# Altium PCB CR99101.PcbDoc
Units mm, origin at the board's own origin, x right, y up, seen from the top; angles counter-clockwise.
Board outline 18 x 20 mm, 2 copper layers (L 01 (Top), L 02), stack 1.506 mm thick; 14 components, 42 nets, 79 pads, 10 vias.
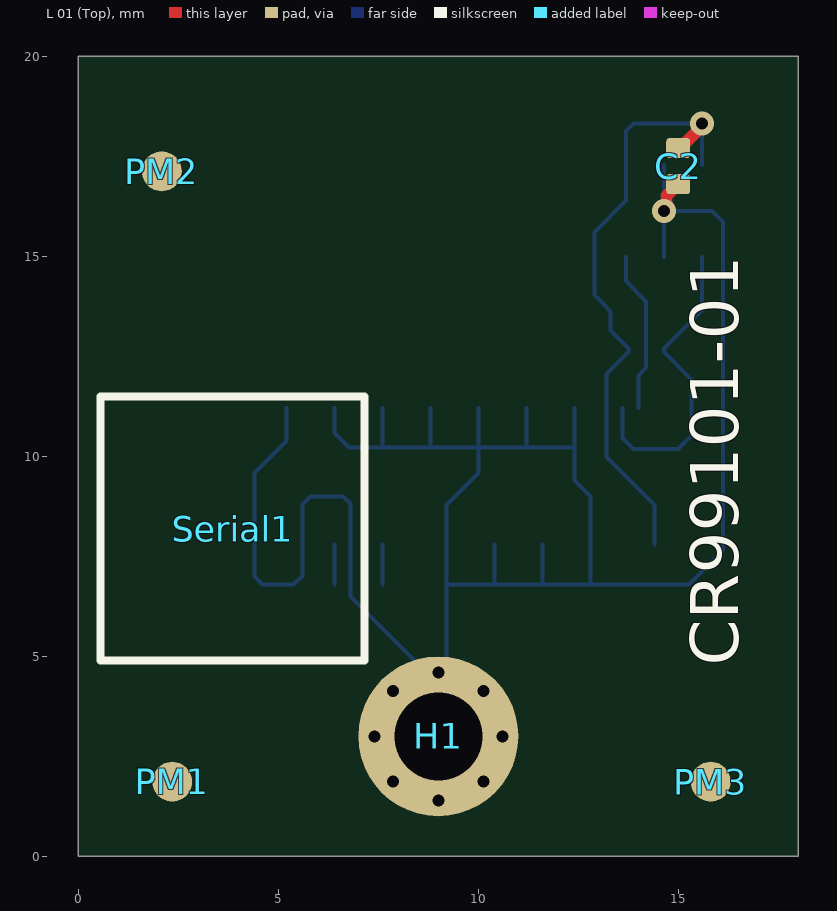
[diagram p0: L 01 (Top) view]
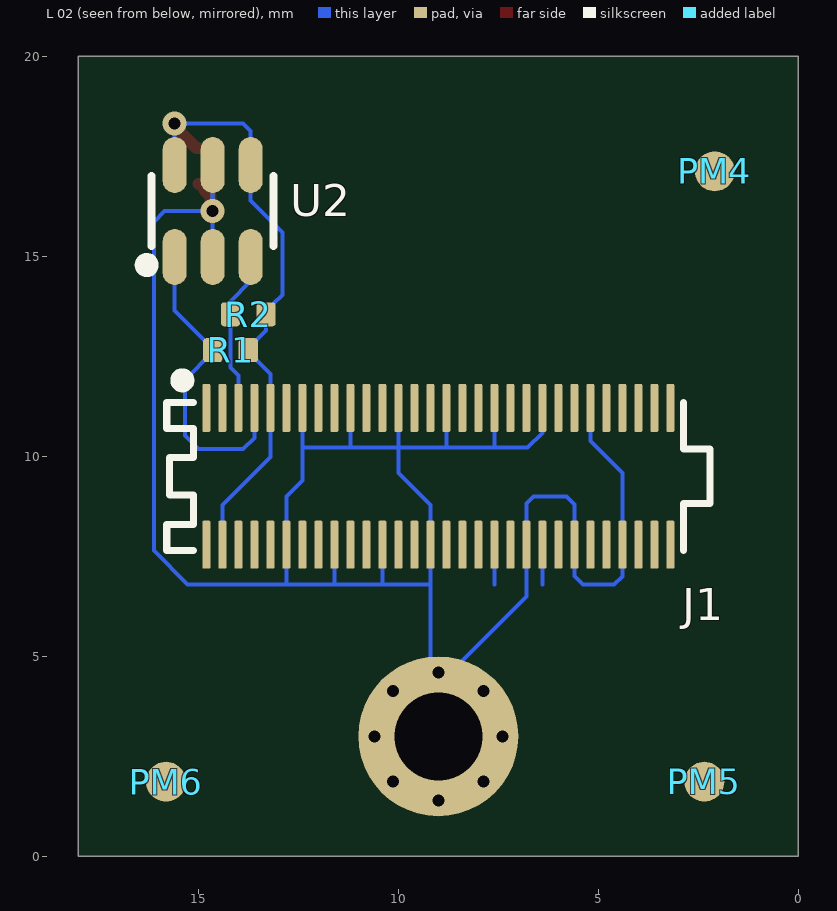
[diagram p1: L 02 view, seen from below]

## Layer stack, top to bottom
Top Solder: solder mask 0.0102, Solder Resist, Dk 3.5
L 01 (Top): signal copper 0.053
Dielectric1: core 1.4, FR-4, Dk 4.2
L 02: signal copper 0.053
Bottom Solder: solder mask 0.0102, Solder Resist, Dk 3.5

## Board outline
0,0 0,20 18.001,20 18.001,0

## Design rules (kind name [scope] priority, off if disabled: settings)
BoardOutlineClearance [All] p1: gap=0 except(0.5: Arc-OutlineEdge Track-OutlineEdge SMDPad-OutlineEdge THPad-OutlineEdge Via-OutlineEdge Fill-OutlineEdge Poly-OutlineEdge Region-OutlineEdge)
Clearance "HV Clearance" [(InNetClass('HV') AND InPolygon)] p1: gap=0.3
Clearance Clearance_ToUnplatedHole [IsPad and ( (HoleSize = 1.5) or (HoleSize = 3.25) ) vs (IsVia or IsTrack OR InPoly)] p2: gap=0.2
Clearance Clearance_DiffPair [(InDifferentialPairClass('All Differential Pairs')) vs (InPolygon)] p3: gap=0.3
Clearance Clearance_PolyToPoly [(InPolygon) vs InNamedPolygon('L01_U1_IN') or    InNamedPolygon('L01_U1_OUT') or InNamedPolygon('L01_U1_PGND')   or InNamedPolygon('L01_U2_IN') or    InNamedPolygon('L01_U2_OUT') or InNamedPolygon('L01_U2_PGND')] p4: gap=0.2
Clearance Clearance_Polygon [(InPolygon)] p5: gap=0.2 except(0.7: Poly-Poly)
Clearance [All] p6: gap=0.125 except(0.1: Track-Track Track-SMDPad Track-Via SMDPad-Via)
ComponentClearance ComponentClearance_logo [(HasFootprint('LOGO PRINT') or HasFootprint('FIDU-DOT - small'))] p1: gap=-0.05 collisioncheckmode=3 verticalgap=-0.1 showdistances=FALSE
ComponentClearance [All] p2: gap=-0.05 collisioncheckmode=3 verticalgap=0.254 showdistances=FALSE
DiffPairsRouting [InNetClass('Diff_IO') and not TouchesRoom('Room_MAX10')] p1: maxlimit=0.16 minlimit=0.16 mostfreqgap=0.16 toplayer_minwidth=0.11 toplayer_maxwidth=0.11 toplayer_prefwidth=0.11 bottomlayer_minwidth=0.11 bottomlayer_maxwidth=0.11 bottomlayer_prefwidth=0.11 maxuncoupledlength=2
FabricationTestPointUsage TestPointUsage [All] p1: valid=0 allowmultiple=FALSE
FabricationTestpoint Testpoint [All] p1: side=3 testpointundercomponent=TRUE minsize=1.016 maxsize=2.54 preferedsize=1.524 minholesize=0 maxholesize=1.016 preferedholesize=0.813 testpointgrid=0.025 allowsidetop=TRUE allowsidebottom=TRUE usegrid=TRUE gridtolerance=0
HoleSize [All] p1: absolutevalues=TRUE maxlimit=5 minlimit=0.2 maxpercent=80.000 minpercent=20.000
MinimumAnnularRing [All] p1: minimumring=0.15
MinimumSolderMaskSliver [All] p1: minsoldermaskwidth=0.1
PlaneClearance [All] p1: clearance=0.4
PlaneConnect [All] p1: planeconnectstyle=Direct reliefexpansion=0.508 reliefentries=4 reliefconductorwidth=0.254 reliefairgap=0.254
PolygonConnect [IsVia] p1: connectstyle=Direct reliefconductorwidth=0.254 reliefentries=4 polygonreliefangle="90 Angle" airgapwidth=0.254
PolygonConnect PolygonConnect_1 [All] p2: connectstyle=Relief reliefconductorwidth=0.254 reliefentries=4 polygonreliefangle="90 Angle" airgapwidth=0.254
RoutingCorners [All] p1: cornerstyle=Round minsetback=2 maxsetback=2
RoutingVias [All] p1: holewidth=0.3 width=0.6 viastyle="Through Hole" minholewidth=0.2 minwidth=0.5 maxholewidth=1 maxwidth=3
SilkToSilkClearance [All] p1: silktosilkclearance=0.025
SilkToSolderMaskClearance SilkscreenOverComponentPads [IsPad] p1: minsilkscreentomaskgap=0.01 clearancetoexposedcopper=TRUE
SolderMaskExpansion SolderMaskExpansion_VIA [(IsVia)] p1: expansion=0 soldermaskfromhole=TRUE
SolderMaskExpansion [All] p2: expansion=0
Width [All] p1: maxlimit=3 minlimit=0.1 preferedwidth=0.1 minimp=50.000000 maximp=50.000000 favimp=50.000000 checkconnectedcopper=TRUE
19 further rules are at their usual default settings.

## Classes and differential pairs
component class CRUVI: C2 H1 J1 R1 R2 SNAP1 U2
component class CR99101: PM1 PM2 PM3 PM4 PM5 PM6 Serial1

## Components (designator, comment, footprint, x,y, rotation, side; value= is the part's Value field where it differs from the comment)
C2 "470nF" CAPC1005X55N 14.998,17.257 r270 top
H1 "Mount.Hole 2mm" MHole2_2mm 9,3 r0 top locked
J1 "ST4-30-1.50-L-D-P-TR" ST4-30-1_50-L-D 9,9.5 r180 bottom locked
PM1 "FIDU-DOT - mini" "FIDU-DOT - mini" 2.348,1.865 r0 top
PM2 "FIDU-DOT - mini" "FIDU-DOT - mini" 2.089,17.124 r0 top
PM3 "FIDU-DOT - mini" "FIDU-DOT - mini" 15.808,1.865 r90 top
PM4 "FIDU-DOT - mini" "FIDU-DOT - mini" 2.089,17.124 r180 bottom
PM5 "FIDU-DOT - mini" "FIDU-DOT - mini" 2.348,1.865 r180 bottom
PM6 "FIDU-DOT - mini" "FIDU-DOT - mini" 15.808,1.865 r90 bottom
R1 "4K7" RESC1005X40N 14.195,12.653 r0 bottom
R2 "4K7" RESC1005X40N 13.75,13.55 r0 bottom
Serial1 "Serialnumber 6,3 x 6.3mm" Serial_6.3x6.3mm 3.861,8.192 r0 top
SNAP1 "SNAP CRUVI 3x" CRUVI_3X_SNAP 31.86,28 r0 top locked
U2 "24AA025E48T-I/OT" SOT95P280X145-6N 14.641,16.132 r90 bottom locked

## Footprints (in the part's own frame and the unit in brackets; to place one, negate y for a bottom-side part, rotate by r counter-clockwise, add the part's x,y. Pads: shape width x height; smd on the part's side, far side on the other; paste and mask are expansions set on the pad)
CAPC1005X55N [mm] "Vishay VJ0402 1 x 0.5mm (+/- 0.05), 0.25mm +0.05/-0.1mm Kontakte"
  rrect33% 0.5x0.6 smd: 1(-0.45,0) 2(0.45,0)
  body extent -0.5,-0.25 0.5,0.25, height 0.5
CRUVI_3X_SNAP [mm]
"FIDU-DOT - mini" [mm]
  round 1 smd paste-1: 0(0,0)
MHole2_2mm [mm]
  round 4 hole 2.2: 1(0,0)
RESC1005X40N [mm] "Vishay D0402 1 x 0.5mm (+/- 0.05), 0.2mm +/-0.1mm Kontakte"
  rrect33% 0.48x0.6 smd: 1(-0.445,0) 2(0.445,0)
  body extent -0.5,-0.25 0.5,0.25, height 0.35
Serial_6.3x6.3mm [mm]
  silkscreen extent -3.3,-3.3 3.3,3.3, body extent -3,-3 3,3, height 0.21
SOT95P280X145-6N [mm]
  oval 1.4x0.6 smd: 1(-1.15,0.95) 2(-1.15,0) 3(-1.15,-0.95) 4(1.15,-0.95) 5(1.15,0) 6(1.15,0.95)
  silkscreen extent -1.5,-1.53 0.87,1.8, body extent -1.35,-1.45 1.35,1.45, height 1.45
ST4-30-1_50-L-D [mm]
  rrect33% 0.2x1.2 smd: 1(-5.8,1.71) 2(-5.8,-1.71) 3(-5.4,1.71) 4(-5.4,-1.71) 5(-5,1.71) 6(-5,-1.71) 7(-4.6,1.71) 8(-4.6,-1.71) 9(-4.2,1.71) 10(-4.2,-1.71) 11(-3.8,1.71) 12(-3.8,-1.71) 13(-3.4,1.71) 14(-3.4,-1.71) 15(-3,1.71) 16(-3,-1.71) 17(-2.6,1.71) 18(-2.6,-1.71) 19(-2.2,1.71) 20(-2.2,-1.71) 21(-1.8,1.71) 22(-1.8,-1.71) 23(-1.4,1.71) 24(-1.4,-1.71) 25(-1,1.71) 26(-1,-1.71) 27(-0.6,1.71) 28(-0.6,-1.71) 29(-0.2,1.71) 30(-0.2,-1.71) 31(0.2,1.71) 32(0.2,-1.71) 33(0.6,1.71) 34(0.6,-1.71) 35(1,1.71) 36(1,-1.71) 37(1.4,1.71) 38(1.4,-1.71) 39(1.8,1.71) 40(1.8,-1.71) 41(2.2,1.71) 42(2.2,-1.71) 43(2.6,1.71) 44(2.6,-1.71) 45(3,1.71) 46(3,-1.71) 47(3.4,1.71) 48(3.4,-1.71) 49(3.8,1.71) 50(3.8,-1.71) 51(4.2,1.71) 52(4.2,-1.71) 53(4.6,1.71) 54(4.6,-1.71) 55(5,1.71) 56(5,-1.71) 57(5.4,1.71) 58(5.4,-1.71) 59(5.8,1.71) 60(5.8,-1.71)
  silkscreen extent -6.79,-1.85 6.79,2.55, body extent -6.87,-2 6.71,2, height 3.56

## Part data
C2: library part 23659, "KON 470nF 6,3V X5R SMD BF 1005 (0402)"
H1: library part 27273
J1: library part 29686
PM1 PM2 PM3 PM4 PM5 PM6: library part 27037, "FIDU-DOT - MINI 0.5mm"
R1 R2: library part 22585, "WID SMD 4K7 1% 0,063W BF 1005 (0402)"
Serial1: library part 26753
SNAP1: library part 29977, "SNAP for CRUVI 3x"
U2: library part 26249

## Via types
v1: diameter 0.6, hole 0.3, L 01 (Top) to L 02, 10 vias

## Nets (pads, with @x,y where several pads share a name; then routed paths per layer and width w, separated by ;. In a path a pad name is that pad's centre, name@x,y a point inside that pad or via, vN(x,y) a via of type N, cw(c..) or ccw(c..) an arc to the next point about the centre after c; other vN are vias at no path point)
+3.3V_D: C2.1 J1.4 J1.9 R1.1 R2.1 U2.4 U2.6 | length 15.6
  L 01 (Top) w0.3: C2.1 15.048,17.707 15.591,18.249 v1(15.591,18.318)
  L 02 w0.1: R2.1@13.115,13.816 13.305,13.626 R2.1 13.305,13.143 13.75,12.698 R1.1 13.75,12.608 13.2,12.058 J1.9 13.2,9.989 14.4,8.789 J1.4 ; R2.1@13.115,13.817 12.9,14.032 12.9,15.6 13.691,16.391 U2.4 13.691,18.131 13.878,18.318 v1(15.591,18.318) U2.6
+5.0V_D: J1.60
A0_N: J1.16
A0_P: J1.14
A1_N: J1.22
A1_P: J1.20
A2_N: J1.28
A2_P: J1.26
A3_N: J1.34
A3_P: J1.32
A4_N: J1.40
A4_P: J1.38 | length 1
  L 02 w0.1: 7.6,6.795 J1.38
A5_N: J1.46
A5_P: J1.44 | length 1
  L 02 w0.1: 6.4,6.795 J1.44
B0_N: J1.17
B0_P: J1.15
B1_N: J1.23
B1_P: J1.21
B2_N: J1.29
B2_P: J1.27
B3_N: J1.35
B3_P: J1.33
B4_N: J1.41
B4_P: J1.39
B5_N: J1.47
B5_P: J1.45
GND: C2.2 H1.1 J1.12 J1.13 J1.18 J1.19 J1.24 J1.25 J1.30 J1.31 J1.37 J1.42 J1.43 J1.48 J1.49 J1.54 U2.2 U2.5 | length 59.5
  L 01 (Top) w0.2: v1(14.641,16.132) v1@14.698,16.189
  L 01 (Top) w0.3: v1@14.698,16.189 14.698,16.507 14.848,16.657 14.848,16.707 14.948,16.807 C2.2
  L 02 w0.1: J1.49 5.2,10.378 4.4,9.578 J1.54 4.4,7 4.605,6.795 5.383,6.795 5.6,7.013 J1.48 5.6,8.8 5.8,9 6.623,9 6.8,8.823 J1.42 6.8,6.5 8.7,4.6 v1(9,4.6) ; J1.43 6.4,10.584 6.769,10.215 7.6,10.215 ; J1.37 7.6,10.215 ; J1.31 8.8,10.215 ; H1.1 9.2,3.2 9.2,6.795 ; J1.25 10,10.215 ; J1.24 10.4,6.795 ; J1.19 11.2,10.215 ; J1.18 11.6,6.795 ; J1.13 12.4,10.215 ; U2.2 v1(14.641,16.132) ; U2.5 v1(14.641,16.132) ; 7.6,10.215 8.8,10.215 ; 8.8,10.215 10,10.215 ; 9.2,6.795 J1.30 9.2,8.782 10,9.582 10,10.215 ; 9.2,6.795 10.4,6.795 ; 10,10.215 11.2,10.215 ; 10.4,6.795 11.6,6.795 ; 11.2,10.215 12.4,10.215 ; 11.6,6.795 12.8,6.795 ; 12.4,10.215 12.4,9.4 12.8,9 J1.12 12.8,6.795 ; 12.8,6.795 15.266,6.795 16.112,7.642 16.112,15.861 15.842,16.132 v1(14.641,16.132)
  other v1: 9,1.4 7.869,1.869 10.132,1.869 7.4,3 10.6,3 7.869,4.131 10.131,4.131
HSI: J1.10
HSIO: J1.2
HSO: J1.6
JTAGEN: J1.57
REFCLK: J1.11
RESET: J1.8
RFU1: J1.1
SMB_ALERT: J1.3
SMB_SCL: J1.7 R1.2 U2.1 | length 7.9
  L 02 w0.1: J1.7 13.6,10.463 13.882,10.181 14.992,10.181 15.336,10.525 15.336,11.913 14.64,12.608 R1.2 14.64,12.698 15.591,13.648 U2.1
SMB_SDA: J1.5 R2.2 U2.3 | length 4.1
  L 02 w0.1: U2.3 13.691,14.378 14.195,13.874 R2.2 14.195,12.215 14,12.02 J1.5
TCK: J1.59
TDI: J1.51
TDO: J1.53
TMS: J1.55
VADJ: J1.36
pads on no net: J1.50 J1.52 J1.56 J1.58 PM1.0 PM2.0 PM3.0 PM4.0 PM5.0 PM6.0

## Silkscreen, mask and mechanical layers (free items; w line width, h text height)
Top Overlay:
  text "CR99101-01" at 16.496,4.761 h1.2 r90
Dim-Top-GM1:
  text "Top View" at 0.542,23.515 h2
Dim-Bot-GM2:
  text "Top View" at 0.542,23.515 h2
PCB-Outline-GM6:
  the board outline again, w0.01
Assembly-Top-GM13:
  text "'.Project'-'.Revision'-'.VariantName'" at 1.109,27.951 h1.5
  text "Variant name:" at -14.891,27.88 h1.5
  text "Top View" at 0.542,23.519 h2
Assembly-Bot-GM14:
  text "'.Project'-'.Revision'-'.VariantName'" at 13.656,27.951 h1.5
  text "Variant name:" at 29.656,27.88 h1.5
  text "Bottom View" at 18.083,23.443 h2

## Dimensions
0,0 to 18.001,0 on Dim-Top-GM1
18.001,20 to 18.001,0 on Dim-Top-GM1
10,9.5 to 9,3 on Dim-Top-GM1
9,3 to 18.001,0 on Dim-Top-GM1
0,0 to 9,3 on Dim-Top-GM1

## Text inside footprints (layer, text, board x,y; h text height)
J1: Assembly-Bot-GM14 "1" at 14.717,10.5 h0.5; Assembly-Bot-GM14 "2" at 14.8,8 h0.5; Assembly-Bot-GM14 "60" at 4.1,8 h0.5; Assembly-Bot-GM14 "59" at 4.1,10.5 h0.5
Serial1: Assembly-Top-GM13 "SerialNr" at 1.445,11.584 h0.7
SNAP1: TDev-Notes-Top-GM11 "1" at 60.16,27 h0.7; TDev-Notes-Top-GM11 "2" at 59.96,32.1 h0.7; TDev-Notes-Top-GM11 "12" at 48.86,32.1 h0.7; TDev-Notes-Top-GM11 "11" at 48.86,27 h0.7; TDev-Notes-Top-GM11 "2" at 61.02,6.8 h0.7; TDev-Notes-Top-GM11 "1" at 61.12,11.6 h0.7; TDev-Notes-Top-GM11 "59" at 47.32,11.6 h0.7; TDev-Notes-Top-GM11 "60" at 47.32,6.8 h0.7; TDev-Notes-Top-GM11 "60" at 24.46,6.8 h0.7; TDev-Notes-Top-GM11 "59" at 24.46,11.6 h0.7; TDev-Notes-Top-GM11 "1" at 38.26,11.6 h0.7; TDev-Notes-Top-GM11 "2" at 38.16,6.8 h0.7; TDev-Notes-Top-GM11 "11" at 26,27 h0.7; TDev-Notes-Top-GM11 "12" at 26,32.1 h0.7; TDev-Notes-Top-GM11 "2" at 37.1,32.1 h0.7; TDev-Notes-Top-GM11 "1" at 37.3,27 h0.7; TDev-Notes-Top-GM11 "2" at 15.3,6.8 h0.7; TDev-Notes-Top-GM11 "1" at 15.4,11.6 h0.7; TDev-Notes-Top-GM11 "59" at 1.6,11.6 h0.7; TDev-Notes-Top-GM11 "60" at 1.6,6.8 h0.7; TDev-Notes-Top-GM11 "1" at 14.44,27 h0.7; TDev-Notes-Top-GM11 "2" at 14.24,32.1 h0.7; TDev-Notes-Top-GM11 "12" at 3.14,32.1 h0.7; TDev-Notes-Top-GM11 "11" at 3.14,27 h0.7; TDev-Notes-Top-GM11 "HS X connector" at 1.1,12.9 h0.7; TDev-Notes-Top-GM11 "HS Y connector" at 23.96,12.9 h0.7; TDev-Notes-Top-GM11 "HS Z connector" at 46.82,12.9 h0.7; TDev-Notes-Top-GM11 "LS C connector" at 48.52,25.75 h0.7; TDev-Notes-Top-GM11 "LS B connector" at 25.66,25.75 h0.7; TDev-Notes-Top-GM11 "LS A connector" at 2.8,25.725 h0.7